# Altium PCB PCB1.PcbDoc
Units mil, origin at the board's own origin, x right, y up, seen from the top; angles counter-clockwise.
Board outline 3700 x 900 mil, 4 copper layers (Top Layer, 3V3, GND, Bottom Layer), stack 23.756 mil thick; 50 components, 28 nets, 185 pads, 72 vias.
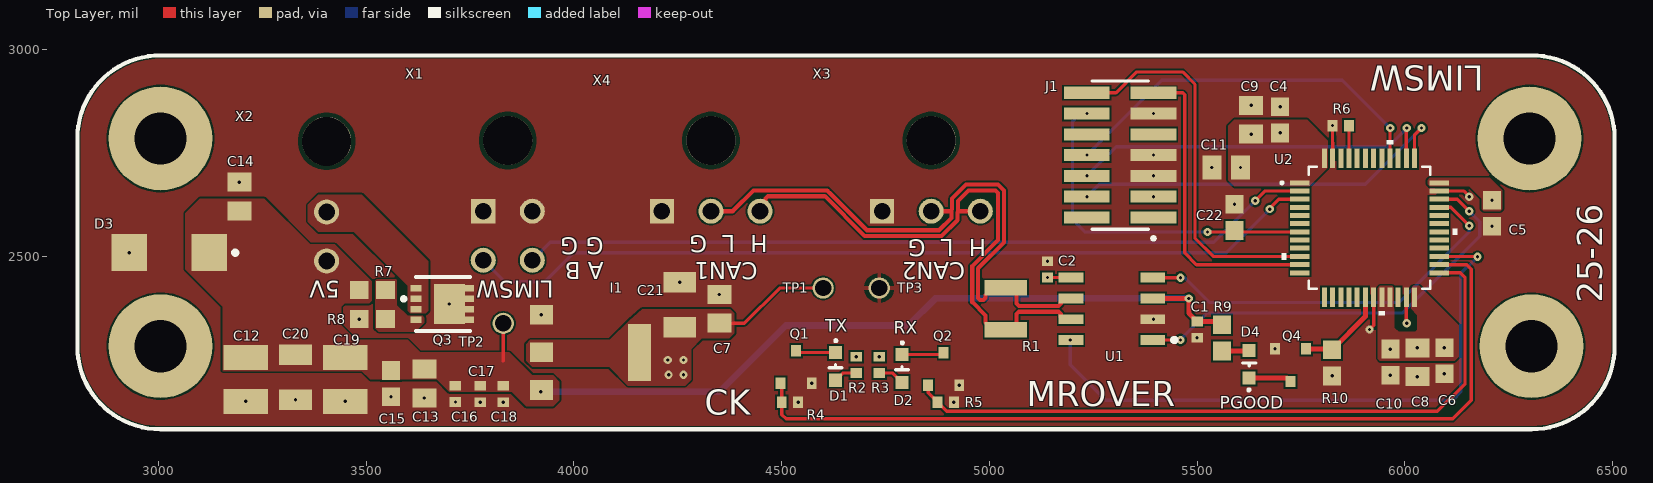
[diagram p0: Top Layer view]
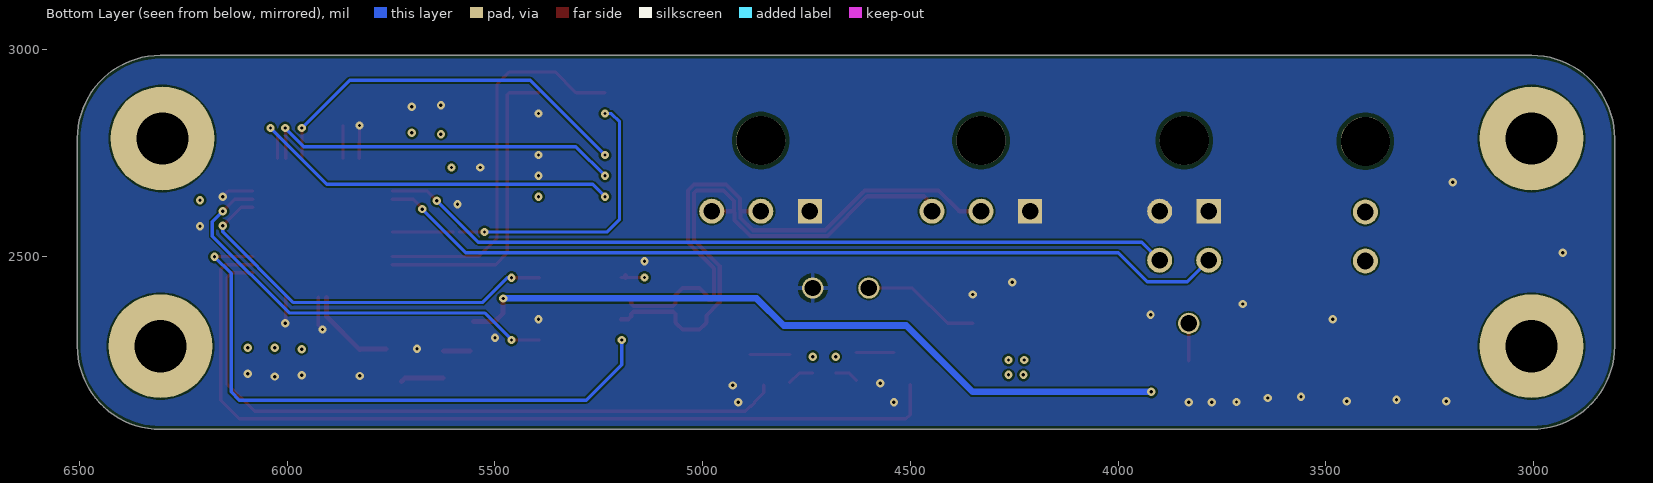
[diagram p1: Bottom Layer view, seen from below]
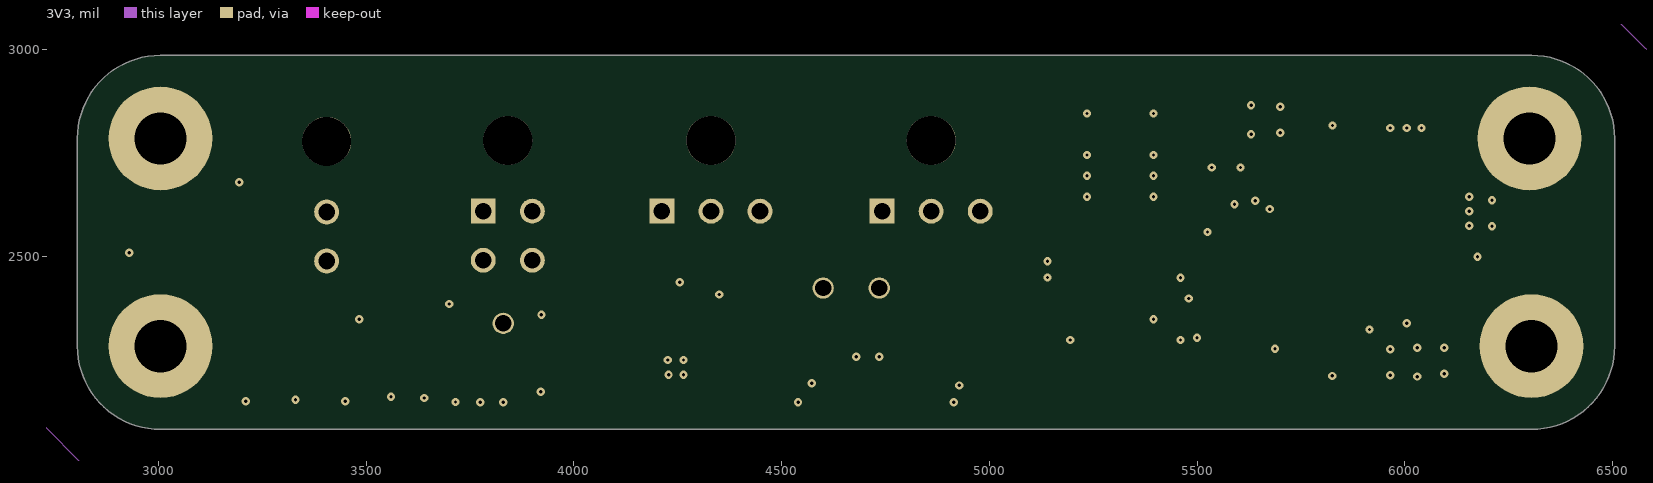
[diagram p2: 3V3]
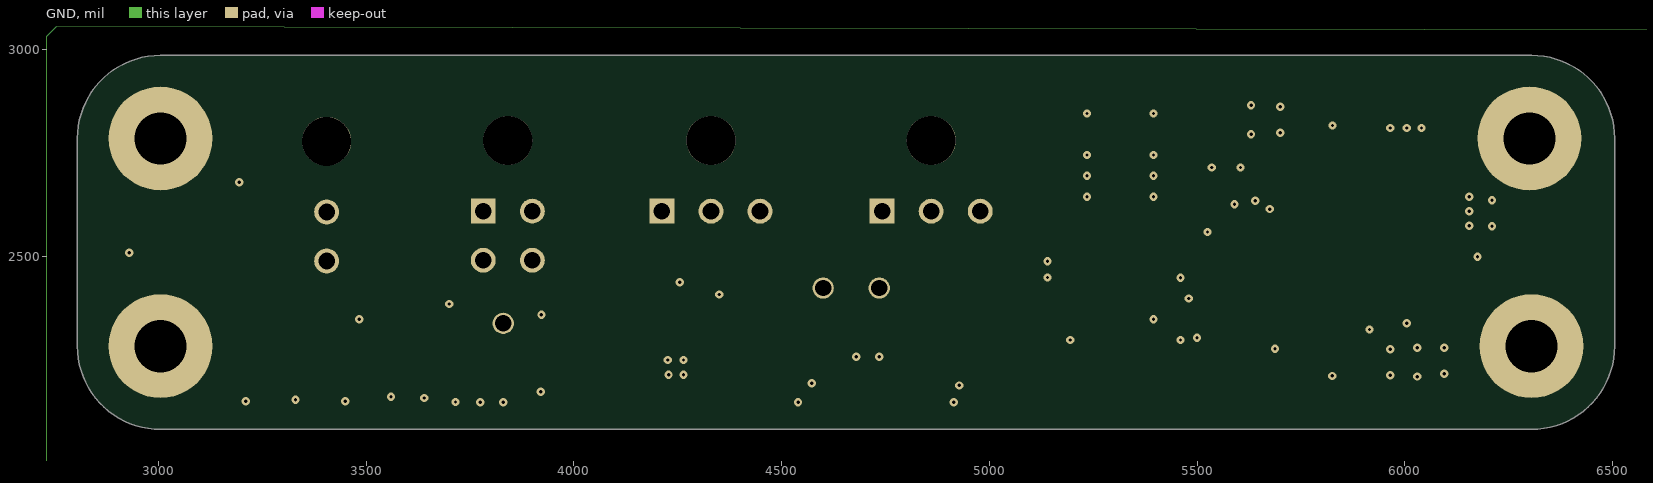
[diagram p3: GND]

## Layer stack, top to bottom
Top Solder: solder mask 0.4, Solder Resist, Dk 3.5
Top Layer: signal copper 1.4
Dielectric 2: prepreg 2.8, PP-006, Dk 4.1
3V3: signal copper 1.378
Dielectric 1: dielectric 12.6, FR-4, Dk 4.8
GND: signal copper 1.378
Dielectric 3: prepreg 2.8, PP-006, Dk 4.1
Bottom Layer: signal copper 1.4
Bottom Solder: solder mask 0.4, Solder Resist, Dk 3.5

## Board outline
2805,2285 2805,2785 cw(c3005,2785) 3005,2985 6305,2985 cw(c6305,2785) 6505,2785 6505,2285 cw(c6305,2285) 6305,2085 3005,2085 cw(c3005,2285)

## Design rules (kind name [scope] priority, off if disabled: settings)
BoardOutlineClearance [All] p1: gap=7.87 ignorepadtopadclearanceinfootprint=FALSE
Clearance "Stitching GND" [IsStitchingVia and InNet('GND') vs (IsVia and (Not IsStitchingVia)) Or IsPad] p1: gap=5 ignorepadtopadclearanceinfootprint=FALSE
Clearance [All] p2: gap=4 ignorepadtopadclearanceinfootprint=FALSE except(5: Arc-Via Track-Via SMDPad-Via THPad-Via Via-Via Via-Fill Via-Poly Via-Region Via-Text; 9.84: Arc-Hole Track-Hole SMDPad-Hole THPad-Hole Via-Hole Fill-Hole Poly-Hole Region-Hole Text-Hole)
ComponentClearance [All] p1: gap=4 collisioncheckmode=3 verticalgap=4 showdistances=TRUE
DiffPairsRouting [All] p1: maxlimit=4 minlimit=4 mostfreqgap=4 toplayer_minwidth=4 toplayer_maxwidth=71497.94 toplayer_prefwidth=4 midlayer1_minwidth=4 midlayer1_maxwidth=71497.94 midlayer1_prefwidth=4 midlayer2_minwidth=4 midlayer2_maxwidth=71497.94 midlayer2_prefwidth=4 bottomlayer_minwidth=4 bottomlayer_maxwidth=71497.94 bottomlayer_prefwidth=4 maxuncoupledlength=500
DiffPairsRouting USB [OnLayer('Top Layer') And InDifferentialPairClass('USB')] p2: maxlimit=5 minlimit=5 mostfreqgap=5 toplayer_maxgap=5 toplayer_prefgap=5 toplayer_minwidth=9.35 toplayer_maxwidth=9.35 toplayer_prefwidth=9.35 midlayer1_mingap=5 midlayer1_minwidth=3.52 midlayer1_maxwidth=3.52 midlayer1_prefwidth=3.52 midlayer2_mingap=5 midlayer2_minwidth=3.52 midlayer2_maxwidth=3.52 midlayer2_prefwidth=3.52 bottomlayer_maxgap=5 bottomlayer_prefgap=5 bottomlayer_minwidth=9.35 bottomlayer_maxwidth=9.35 bottomlayer_prefwidth=9.35 impedanceprofiledriven=TRUE maxuncoupledlength=500
Height [All] p1: minheight=0 maxheight=71497.94 prefheight=500
HoleSize [All] p1: absolutevalues=TRUE maxlimit=248.03 minlimit=7.87 maxpercent=80.000 minpercent=20.000
HoleToHoleClearance [All] p1: gap=9.84 allowstackedmicrovias=FALSE
MinimumAnnularRing [All] p1: minimumring=3
MinimumSolderMaskSliver [All] p1: minsoldermaskwidth=0
PlaneClearance [All] p1: clearance=4
PlaneConnect PlaneConnectPowerPads [InPadClass('PowerPads')] p1: planeconnectstyle=Direct reliefexpansion=20 reliefentries=4 reliefconductorwidth=10 reliefairgap=10
PlaneConnect [All] p2: planeconnectstyle=Direct reliefexpansion=11.81 reliefentries=4 reliefconductorwidth=4 reliefairgap=4
PolygonConnect PolygonConnectPowerPads [All vs (InPadClass('PowerPads'))] p1: connectstyle=Direct reliefconductorwidth=10 reliefentries=4 polygonreliefangle="90 Angle" airgapwidth=10
PolygonConnect [All] p2: connectstyle=Direct reliefconductorwidth=4 reliefentries=4 polygonreliefangle="90 Angle" airgapwidth=4
RoutingVias [All] p1: holewidth=12.01 width=23.82 viastyle="Through Hole" minholewidth=11.81 minwidth=23.62 maxholewidth=15.94 maxwidth=27.76
SilkToSilkClearance [All] p1: silktosilkclearance=0
SilkToSolderMaskClearance [IsPad] p1: minsilkscreentomaskgap=4 clearancetoexposedcopper=TRUE
SolderMaskExpansion [All] p1: expansion=2.95 istentingtop=FALSE
SupplyNets "Schematic Supply Nets_2" [InNet('VBAT')] p1: voltage=0.000
SupplyNets "Schematic Supply Nets_3" [InNet('GND')] p2: voltage=0.000
SupplyNets "Schematic Supply Nets_1" [InNet('5V')] p3: voltage=0.000
Width [All] p1: maxlimit=20 minlimit=4 preferedwidth=10 minimp=50.000000 maximp=50.000000 favimp=50.000000
20 further rules are at their usual default settings.

## Classes and differential pairs
component class MCU: C4 C5 C6 C7 C8 C9 C10 C11 C22 D4 J1 Q4 R6 R9 R10 U2
component class Input_Power: C12 C13 C14 C15 C16 C17 C18 C19 C20 C21 D3 I1 Q3 R7 R8 TP1 TP2 TP3 X2
component class Headers: X1 X3 X4
component class CAN: C1 C2 D1 D2 Q1 Q2 R1 R2 R3 R4 R5 U1
differential pair CAN: +CAN_H -CAN_L

## Components (designator, comment, footprint, x,y, rotation, side; value= is the part's Value field where it differs from the comment)
C1 "CC0402KRX7R7BB104" CAP-0402 5500,2325 r270 top
C2 "CC0402KRX7R7BB104" CAP-0402 5140,2470 r90 top
C4 "CC0603KRX7R0BB104" CAP-0603 5700,2830 r270 top
C5 "CC0603KRX7R0BB104" CAP-0603 6210,2605 r90 top
C6 "CC0603KRX7R0BB104" CAP-0603 6095,2250 r90 top
C7 "CC0805KKX5R9BB475" CAP-0805 4350,2375 r270 top
C8 "GRM2195C1H103JA01D" CAP-0805 6030,2246.5 r90 top
C9 "CC0805KKX7R9BB105" CAP-0805 5630,2830 r270 top
C10 "CC0603KRX7R0BB104" CAP-0603 5965,2246.5 r90 top
C11 "CC0805KKX7R9BB105" CAP-0805 5570,2715 r0 top
C12 "CL32B106KBJNNNE" CAP-1210 3210,2205 r90 top
C13 "CC0805KKX7R9BB105" CAP-0805 3640,2195 r90 top
C14 "CC0805KRX7R9BB104" CAP-0805 3195,2645 r270 top
C15 "CC0603KPX7R9BB103" CAP-0603 3560,2195 r90 top
C16 "CC0402KRX7R9BB102" CAP-0402 3715,2170.32 r90 top
C17 "CC0402JRNPO9BN101" CAP-0402 3775,2170 r90 top
C18 "CC0402JRNPO9BN100" CAP-0402 3830,2170 r90 top
C19 "CL32B106KBJNNNE" CAP-1210 3450,2205 r90 top
C20 "293D106X9016A2TE3" CAP-1206 3330,2210 r90 top
C21 "293D106X9016A2TE3" CAP-1206 4255,2385 r270 top
C22 "CC0603KRX7R0BB104" CAP-0603 5590,2595 r90 top
D1 "BL-HKC36G-AV-TRB" LED-0603 4600.43,2293.2 r270 top
D2 "BL-HKC36G-AV-TRB" LED-0603 4760.43,2288.2 r270 top
D3 "SMBJ6.0" "DO-214AA (SMBJ)" 3025,2510 r0 top
D4 "BL-HKC36G-AV-TRB" LED-0603 5654.57,2184.8 r90 top
I1 "LM1117IMPX-3.3/NOPB" IC-SOT-223-4 4040,2270 r0 top
J1 "FTSH-107-01-L-DV-K" SAMTEC_FTSH-107-01-L-DV-K 5315,2745 r90 top
Q1 "T2N7002AK,LM" IC-SOT23-3 4535,2235 r0 top
Q2 "T2N7002AK,LM" IC-SOT23-3 4890,2230 r0 top
Q3 "CSD18543Q3AT" IC-8VSONCLIP 3585.47,2458.93 r270 top
Q4 "T2N7002AK,LM" IC-SOT23-3 5725,2239.37 r180 top
R1 "RC1210FR-07120RL" RES-1210 5040,2375 r270 top
R2 "RC0402FR-07100RL" RES-0402 4680,2240 r90 top
R3 "RC0402FR-07100RL" RES-0402 4735,2240 r90 top
R4 "RC0402FR-0780K6L" RES-0402 4520,2150 r180 top
R5 "RC0402FR-0780K6L" RES-0402 4895,2150 r180 top
R6 "RC0402FR-070RL" RES-0402 5845.69,2816 r0 top
R7 "RC0603FR-07200KL" RES-0603 3515,2420 r0 top
R8 "RC0603FR-07100KL" RES-0603 3515,2350 r180 top
R9 "RT0603FRE131KL" RES-0603 5560,2305 r270 top
R10 "RT0603FRE131KL" RES-0603 5825,2245 r90 top
TP1 "5003" TEST-POINT-0001 4600,2425 r0 top
TP2 "5003" TEST-POINT-0001 3830,2340 r0 top
TP3 "5003" TEST-POINT-0001 4735,2425 r0 top
U1 "TCAN1044VDRQ1" IC-8SOIC 5295,2375 r90 top
U2 "STM32G431CBT6" IC-LQFP48 5915,2570 r0 top
X1 "Molex - Micro-Fit 3.0 Series connector,  3.00mm (0.118\") pitch header, 4 positions." 43045-0400 3840.94,2780.08 r180 top
X2 "Molex - Micro-Fit 3.0 Series connector,  3.00mm (0.118\") pitch header, 2 positions." 43045-0200 3405,2778.19 r180 top
X3 "Molex 43650-0300" 43650-0300 4860,2780 r180 top
X4 "Molex 43650-0300" 43650-0300 4330,2780 r180 top

## Footprints (in the part's own frame and the unit in brackets; to place one, negate y for a bottom-side part, rotate by r counter-clockwise, add the part's x,y. Pads: shape width x height; smd on the part's side, far side on the other; paste and mask are expansions set on the pad)
43045-0200 [mm]
  round 3 hole 3 unplated: 1(0,0)
  round 1.53 / inner round 1.524 / far side round 1.53 hole 1.02: P$1(0,4.32) P$2(0,7.32)
43045-0400 [mm]
  round 3 hole 3 unplated: 1(0,0)
  rect 1.482x1.482 / inner rect 1.524x1.524 / far side rect 1.482x1.482 hole 1.02: P$1(1.5,4.32)
  round 1.53 / inner round 1.524 / far side round 1.53 hole 1.02: P$2(-1.5,4.32) P$3(1.5,7.32) P$4(-1.5,7.32)
  body extent -5.07,-4.55 5.08,7.69, height 8.83
43650-0300 [mm]
  round 3 hole 3 unplated: 1(0,0)
  rect 1.482x1.482 / inner rect 1.524x1.524 / far side rect 1.482x1.482 hole 1.02: P$1(3,4.32)
  round 1.53 / inner round 1.524 / far side round 1.53 hole 1.02: P$2(0,4.32) P$3(-3,4.32)
  body extent -6.32,-4.57 6.33,5.33, height 5.68
CAP-0402 [mm]
  rect 0.6x0.7 smd: 1(-0.5,0) 2(0.5,0)
  body extent -0.5,-0.22 0.5,0.23, height 0.5
CAP-0603 [mm]
  rect 1.15x1.1 smd: 1(-0.8,0) 2(0.8,0)
  body extent -0.8,-0.45 0.8,0.45, height 0.8
CAP-0805 [mm]
  rect 1.16x1.47 smd: 1(-0.88,0) 2(0.88,0)
  body extent -1,-0.63 1,0.63, height 0.94
CAP-1206 [mm]
  rect 1.25x2 smd: 1(-1.375,0) 2(1.375,0)
  body extent -1.6,-0.8 1.6,0.8, height 1.5
CAP-1210 [mm]
  rect 1.53x2.72 smd: 1(-1.341,0) 2(1.341,0)
  body extent -1.6,-1.25 1.6,1.25, height 2.7
"DO-214AA (SMBJ)" [mm]
  rect 2.16x2.26 smd: 1(-2.416,0) 2(2.484,0)
  silkscreen extent 3.94,-0.12 4.19,0.12, body extent -2.72,-1.95 2.78,1.95, height 2.45
IC-8SOIC [mm]
  rect 0.6x1.5 smd: 1(-1.905,-2.5) 2(-0.635,-2.5) 3(0.635,-2.5) 4(1.905,-2.5) 5(1.905,2.5) 6(0.635,2.5) 7(-0.635,2.5) 8(-1.905,2.5)
  silkscreen extent -2.03,-3.94 -1.78,-3.69, body extent -2.45,-3 2.45,3, height 1.75
IC-8VSONCLIP [mm]
  rect 0.4x0.7 smd paste-100 mask+0.05: 1(2.812,0.877) 2(0.862,0.877) 2(1.512,0.877) 2(2.162,0.877) 3(0.862,4.077) 3(1.512,4.077) 3(2.162,4.077) 3(2.812,4.077)
  rect 2.45x1.9 smd paste-100 mask+0.05: 3(1.837,2.917)
  silkscreen extent 0.19,0.03 3.49,4.18, body extent 0.18,0.89 3.48,4.19, height 1.1
IC-LQFP48 [mil]
  rect 47x12 smd paste+0 mask+0: 1(-167.32,108.27) 2(-167.32,88.58) 3(-167.32,68.9) 4(-167.32,49.21) 5(-167.32,29.53) 6(-167.32,9.84) 7(-167.32,-9.84) 8(-167.32,-29.53) 9(-167.32,-49.21) 10(-167.32,-68.9) 11(-167.32,-88.58) 12(-167.32,-108.27) 25(167.32,-108.27) 26(167.32,-88.58) 27(167.32,-68.9) 28(167.32,-49.21) 29(167.32,-29.53) 30(167.32,-9.84) 31(167.32,9.84) 32(167.32,29.53) 33(167.32,49.21) 34(167.32,68.9) 35(167.32,88.58) 36(167.32,108.27)
  rect 12x47 smd paste+0 mask+0: 13(-108.27,-167.32) 14(-88.58,-167.32) 15(-68.9,-167.32) 16(-49.21,-167.32) 17(-29.53,-167.32) 18(-9.84,-167.32) 19(9.84,-167.32) 20(29.53,-167.32) 21(49.21,-167.32) 22(68.9,-167.32) 23(88.58,-167.32) 24(108.27,-167.32) 37(108.27,167.32) 38(88.58,167.32) 39(68.9,167.32) 40(49.21,167.32) 41(29.53,167.32) 42(9.84,167.32) 43(-9.84,167.32) 44(-29.53,167.32) 45(-49.21,167.32) 46(-68.9,167.32) 47(-88.58,167.32) 48(-108.27,167.32)
  silkscreen extent -214,-211 211,211, body extent -177,-177 177,177, height 63
IC-SOT23-3 [mm]
  rect 0.6x0.7 smd: 1(-0.95,-1) 2(0.95,-1) 3(0,1)
  body extent -1.46,-1.18 1.46,1.19, height 1.12
IC-SOT-223-4 [mm]
  rect 1.4x1.2 smd mask+0.07: 1(-3,2.3) 3(-3,-2.3) 4(-3,0)
  rect 1.4x3.5 smd: 2(3,0)
  body extent -3.5,-3.25 3.5,3.25, height 1.68
LED-0603 [mm]
  rect 0.8x0.8 smd: 1(2.291,0.751) 2(0.589,0.751)
  silkscreen extent -0.2,0.34 1.52,1.13, body extent 0.65,0.36 2.25,1.16, height 0.39
RES-0402 [mm]
  rect 0.6x0.7 smd: 1(-0.5,0) 2(0.5,0)
  body extent -0.5,-0.25 0.5,0.25, height 0.3
RES-0603 [mm]
  rect 1.15x1.1 smd: 1(-0.8,0) 2(0.8,0)
  body extent -0.8,-0.4 0.8,0.4, height 0.43
RES-1210 [mm] "Chip Resistor, 2-Leads, Body 3.10x2.60mm, IPC High Density"
  rect 0.95x2.6 smd: 1(-1.275,0) 2(1.275,0)
  body extent -1.6,-1.35 1.6,1.35, height 0.6
SAMTEC_FTSH-107-01-L-DV-K [mm]
  rect 0.74x2.79 smd: 01(-3.81,-2.035) 02(-3.81,2.035) 03(-2.54,-2.035) 04(-2.54,2.035) 05(-1.27,-2.035) 06(-1.27,2.035) 07(0,-2.035) 08(0,2.035) 09(1.27,-2.035) 10(1.27,2.035) 11(2.54,-2.035) 12(2.54,2.035) 13(3.81,-2.035) 14(3.81,2.035)
  silkscreen extent -5.19,-2.13 4.53,1.72, body extent -4.44,-2.82 4.44,3.02, height 5.96
TEST-POINT-0001 [mm] "2024 miniature test point"
  round 1.3 hole 1: 1(0,0)
  body extent -1.27,-1.27 1.27,1.27, height 4.57

## Part data
C1 C2: library part CAP-0.1U-0001, "CAP CER 0.1UF 16V X7R 0402", Capacitance="100 nF", Voltage Rating="16 V", ComponentLink2Description=Datasheet, ComponentLink2URL=https://www.yageo.com/upload/media/product/productsearch/datasheet/mlcc/UPY-GPHC_X7R_6.3V-to-250V_24.pdf, Device Class=Ceramic, Size=0402
C4 C5 C6 C10 C22: library part CAP-100N-0001, "CAP CER 0.1UF 100V X7R 0603", Capacitance="100 nF", Voltage="100 V", ComponentLink1Description=Datasheet, ComponentLink1URL=https://www.yageo.com/upload/media/product/app/datasheet/mlcc/upy-np0x7r_mv_100-to-630v.pdf, Device Class=Ceramic, Size=0603
C7: library part CAP-4.7U-0002, "CAP CER 4.7UF 50V X5R 0805", Capacitance="4.7 uF", Voltage="50 V", ComponentLink2Description=Datasheet, ComponentLink2URL=http://www.yageo.com/documents/recent/UPY-GPHC_Y5V_6.3V-to-50V_8.pdf, Device Class=Ceramic, Size=0805
C8: library part CAP-10N-0001, "CAP CER 10000PF 50V C0G/NP0 0805", Capacitance=10nF, Voltage=50V, ComponentLink1Description=Datasheet, ComponentLink1URL=https://search.murata.co.jp/Ceramy/image/img/A01X/G101/ENG/GRM2195C1H103JA01-01.pdf, Device Class=Ceramic, Size=0805
C9 C11 C13: library part CAP-1U-0001, "CAP CER 1UF 50V X7R 0805", Capacitance="1.0 uF", Voltage="50 V", ComponentLink2Description=Datasheet, ComponentLink2URL=https://www.yageo.com/upload/media/product/productsearch/datasheet/mlcc/UPY-GPHC_X7R_6.3V-to-250V_24.pdf, Device Class=Ceramic, Size=0805
C12 C19: library part CAP-10U-0002, "CAP CER 10UF 50V X7R 1210", Capacitance="10 uF", Voltage=50V, ComponentLink1Description=Datasheet, ComponentLink1URL=https://mm.digikey.com/Volume0/opasdata/d220001/medias/docus/41/CL32B106KBJNNNE_Spec.pdf, Device Class=Ceramic, Size=1210
C14: library part CAP-0.1U-0002, "CAP CER 0.1UF 50V X7R 0805", Capacitance="100 nF", Voltage Rating="50 V", ComponentLink2Description=Datasheet, ComponentLink2URL=https://www.yageo.com/upload/media/product/productsearch/datasheet/mlcc/UPY-GPHC_X7R_6.3V-to-250V_24.pdf, Device Class=Ceramic, Size=0805
C15: library part CAP-10N-0002, "CAP CER 10000PF 50V X7R 0603", Capacitance="10 nF", Voltage="50 V", ComponentLink2Description=Datasheet, ComponentLink2URL=http://www.yageo.com/documents/recent/UPY-GPHC_X7R_6.3V-to-50V_18.pdf, Device Class=Ceramic, Size=0603
C16: library part CAP-1N-0001, "CAP CER 1000PF 50V X7R 0402", Capacitance="1.0 nF", Voltage="50 V", ComponentLink2Description=Datasheet, ComponentLink2URL=http://www.yageo.com/documents/recent/UPY-GP_NP0_16V-to-50V_16.pdf, Device Class=Ceramic, Size=0402
C17: library part CAP-100P-0001, "CAP CER 100PF 50V C0G/NPO 0402", Capacitance="100 pF", Voltage=50V, ComponentLink1Description=Datasheet, ComponentLink1URL=https://www.yageo.com/upload/media/product/productsearch/datasheet/mlcc/UPY-GP_NP0_16V-to-50V_18.pdf, Device Class=Ceramic, Size=0402
C18: library part CAP-10P-0001, "CAP CER 10PF 50V C0G/NPO 0402", Capacitance="10 pF", Voltage=50V, ComponentLink1Description=Datasheet, ComponentLink1URL=https://www.yageo.com/upload/media/product/productsearch/datasheet/mlcc/UPY-GP_NP0_16V-to-50V_18.pdf, Device Class=Ceramic, Size=0402
C20 C21: library part CAP-10U-0004, "CAP TANT 10UF 10% 16V 1206", Capacitance="10 uF", Voltage=16V, ComponentLink1Description=Datasheet, ComponentLink1URL=https://www.lcsc.com/datasheet/lcsc_datasheet_2304140030_Vishay-Intertech-293D106X9016A2TE3_C110038.pdf, Device Class=Tantalum, Size=1206
D1 D2 D4: library part LED-0001, "LED YELLOW CLEAR 0603 SMD", Forward Current=30mA, Forward Voltage=2V, ComponentLink1Description=Datasheet, ComponentLink1URL=https://www.americanbrightled.com/pdffiles/led-components/smt/BL-HKC36G-AV-TRB.pdf
D3: library part DIO-TVS-0001, "TVS DIODE 40VWM 64.5VC DO214AA", Current Rating=9.3A, Voltage Rating=64.5V, ComponentLink1Description=Datasheet, ComponentLink1URL=https://www.littelfuse.com/media?resourcetype=datasheets&itemid=09a6ae9a-73cb-4ac4-acac-e6dab92ab953&filename=littelfuse_tvs_diode_smbj_datasheet.pdf
I1: library part IC_LDO_3V3_0001, "IC REG LIN 3.3V 800MA SOT223-4", ComponentLink1Description="New link", ComponentLink1URL=https://www.ti.com/lit/ds/symlink/lm1117.pdf?HQS=dis-dk-null-digikeymode-dsf-pf-null-wwe&ts=1721700739746
J1: library part CONN_Flashing-0001, "Connector Header Surface Mount 14 position 0.050\" (1.27mm)", Package=None, Availability=Unavailable, ComponentLink1Description=Datasheet, ComponentLink1URL=https://mm.digikey.com/Volume0/opasdata/d220001/medias/docus/6209/ftsh-1xx-xx-xxx-dv-xxx-xxx-x-xx-mkt.pdf, MF=Samtec, MP=FTSH-107-01-L-DV-K, Price=None
Q1 Q2 Q4: library part NMOS-200MA-0001, "MOSFET N-CH 60V 200MA SOT23", Continuous Current=200mA, Voltage=60V, ComponentLink1Description=Datasheet, ComponentLink1URL=https://toshiba.semicon-storage.com/info/T2N7002AK_datasheet_en_20150401.pdf?did=29712&prodName=T2N7002AK
Q3: library part NMOS-60A-0001, "MOSFET N-CH 60V 12A/60A 8VSON", Continuous Current=60A, Voltage=60V, ComponentLink2Description=Datasheet, ComponentLink2URL=http://www.ti.com/lit/ds/symlink/csd18543q3a.pdf
R1: library part RES-120-0001, "RES 120 OHM 1% 1/2W 1210", Power=1/2W, Resistance=120R, Tolerance=1%, ComponentLink1Description=Datasheet, ComponentLink1URL=https://www.yageo.com/upload/media/product/products/datasheet/rchip/PYu-RC_Group_51_RoHS_L_12.pdf, Size=1210
R2 R3: library part RES-100-0001, "RES 100 OHM 1% 1/16W 0402", Power=1/16W, Resistance=100R, Tolerance=1%, ComponentLink1Description=Datasheet, ComponentLink1URL=https://www.yageo.com/upload/media/product/products/datasheet/rchip/PYu-RC_Group_51_RoHS_L_12.pdf, Size=0402
R4 R5: library part RES-80.6k-0001, "80.6 kOhms ±1% 0.063W, 1/16W Chip Resistor 0402 (1005 Metric) Moisture Resistant Thick Film", Power=1/16W, Resistance=80.6k, Tolerance=1%, ComponentLink1Description=Datasheet, ComponentLink1URL=https://www.yageo.com/upload/media/product/products/datasheet/rchip/PYu-RC_Group_51_RoHS_L_12.pdf, Size=0402
R6: library part RES-0-0002-JLC, "62.5mW Thick Film Resistors 50V -55℃~+155℃ 0Ω 0402 Chip Resistor - Surface Mount ROHS", JLC part number=C106231, Power="62.5 mW", Resistance="0 Ohm", Assembled?=yes
R7: library part RES-200k-0001, "RES SMD 200K OHM 1% 1/10W 0603", Power=100mW, Resistance=200k, Tolerance=1%, ComponentLink1Description=Datasheet, ComponentLink1URL=https://www.yageo.com/upload/media/product/products/datasheet/rchip/PYu-RC_Group_51_RoHS_L_12.pdf, Size=0603
R8: library part RES-100k-0001, "RES SMD 100K OHM 1% 1/10W 0603", Power=100mW, Resistance=100k, Tolerance=1%, ComponentLink1Description=Datasheet, ComponentLink1URL=https://www.yageo.com/upload/media/product/products/datasheet/rchip/PYu-RC_Group_51_RoHS_L_12.pdf, Size=0603
R9 R10: library part RES-1K-0002, "1 kOhms ±1% 0.1W, 1/10W Chip Resistor 0603 (1608 Metric) Thin Film", Manufacturer=YAGEO, Package Size=0603, Power Rating=1/10W, Resistance="1kOhm +/-1%", Assembled?=no, Manufacturer Part Number=RT0603FRE131KL
TP1 TP2 TP3: library part TEST-POINT-0001, "Oranange PC Test Point, Miniature Phoisphor Bronze Silver Plating Through Hole Mounting Type"
U1: library part IC-CAN-0001, "IC TRANSCEIVER 1/1 8SOIC", ComponentLink1Description=Datasheet, ComponentLink1URL=https://www.ti.com/lit/ds/symlink/tcan1044-q1.pdf?HQS=dis-dk-null-digikeymode-dsf-pf-null-wwe&ts=1728758303289&ref_url=https%253A%252F%252Fwww.ti.com%252Fgeneral%252Fdocs%252Fsuppproductinfo.tsp%253FdistId%253D10%2526gotoUrl%253Dhttps%253A%252F%252Fwww.ti.com%252Flit%252Fgpn%252Ftcan1044-q1
U2: library part IC-STM32G431CBT6, "IC MCU 32BIT 128KB FLASH 48LQFP", Package=48LQFP, ComponentLink1Description=Datasheet, ComponentLink1URL=https://www.st.com/resource/en/datasheet/stm32g431cb.pdf
X1: library part HEADER_POS4_?43045-0401, Package=43045-0400, DeviceName=43045-0401, DeviceSetName=HEADER_POS4_?, GateName_1=G$1, LibraryName=con-molex-micro-fit-3_0_2, SymbolName_1=HEADER_POS4
X2: library part HEADER_POS2_?43045-0200, Package=43045-0200, DeviceName=43045-0200, DeviceSetName=HEADER_POS2_?, GateName_1=G$1, LibraryName=con-molex-micro-fit-3_0_2, SymbolName_1=HEADER_POS2
X3 X4: library part "Micro-Fit Molex 3 Pin Right Angle", Package=43650-0300, DeviceName=43650-0300, DeviceSetName=HEADER_POS3_?, GateName_1=G$1, LibraryName=con-molex-micro-fit-3_0_2, SymbolName_1=HEADER_POS3

## Free pads (board coordinates)
  round 250 hole 126: ""(3005,2285) ""(3005,2785) ""(6300,2785) ""(6305,2285)

## Via types
v1: diameter 20, hole 8, Top Layer to Bottom Layer, 72 vias

## Nets (pads, with @x,y where several pads share a name; then routed paths per layer and width w, separated by ;. In a path a pad name is that pad's centre, name@x,y a point inside that pad or via, vN(x,y) a via of type N, cw(c..) or ccw(c..) an arc to the next point about the centre after c; other vN are vias at no path point)
5V: C1.1 C12.2 C13.2 C14.2 C15.2 C16.2 C17.2 C18.2 C19.2 C20.2 D3.2 I1.3 R7.1 TP2.1 U1.3 X2.P$2 | length 1945.2
  Top Layer w8: 3830,2250 TP2.1
  Top Layer w12: U1.3 v1(5480,2400) 5480,2364.68 C1.1 5551.81,2344.68
  Bottom Layer w16: v1(3920,2175) 4350,2175 4510,2335 4805,2335 4870,2400 5345,2400 v1(5480,2400)
CAN_H: R1.2 U1.7 X3.P$3 X4.P$3 | length 1370.3
  Top Layer w10: X4.P$3 4448.11,2623.51 4461.66,2637.06 4461.66,2640.18 4467.52,2646.04 4603.96,2646.04 4700,2550 4885,2550 4923.06,2588.05 4923.06,2607.58 4925.4,2609.92 ; X3.P$3 4925.4,2609.92 ; U1.7 5178.86,2350 5172.05,2356.81 5172.05,2362.14 5166.19,2368 5071.05,2368 5065.2,2362.14 5065.2,2341.5 5048.5,2324.8 R1.2 5007.52,2324.8 4990.82,2341.5 4990.82,2359.14 4959,2390.96 4959,2478.42 5021,2540.42 5021,2654.14 5015.14,2660 4949.8,2660 4924.23,2634.43 4924.23,2611.09 4925.4,2609.92
CAN_L: R1.1 U1.6 X3.P$2 X4.P$2 | length 1458.8
  Top Layer w10: X4.P$2 4382.4,2609.92 4432.52,2660.04 4609.76,2660.04 4617.96,2651.84 4705.8,2564 4879.2,2564 4909.06,2593.85 4909.06,2609.92 ; X3.P$2 4909.06,2609.92 ; U1.6 5178.86,2400 5172.05,2393.19 5172.05,2387.86 5166.19,2382 5071.05,2382 5065.2,2387.86 5065.2,2408.5 5048.5,2425.2 R1.1 5007.52,2425.2 4990.82,2408.5 4990.82,2401.53 4985.89,2396.6 4977.73,2396.6 4973,2401.32 4973,2472.62 5035,2534.62 5035,2659.94 5020.94,2674 4944,2674 4910.23,2640.23 4910.23,2614.55 4909.06,2613.38 4909.06,2609.92
CAN_RX: U1.4 U2.33 | length 962.8
  Top Layer w8: U1.4 v1(5460,2450) ; U2.33 6110.79,2619.21 v1(6155,2575)
  Bottom Layer w8: v1(5460,2450) 5470,2450 5530,2390 5985,2390 6155,2560 v1(6155,2575)
CAN_RX_LED: Q2.1 R5.2 U2.25 | length 1680.1
  Top Layer w8: Q2.1 4852.6,2172.72 R5.2 4875.31,2148.03 4883.13,2140.22 4885.09,2140.22 4897.09,2128.22 6078.22,2128.22 6145,2195 6145,2450 6133.27,2461.73 U2.25
CAN_STB: U1.8 U2.27 | length 1478.2
  Top Layer w8: v1(5195,2300) U1.8 ; U2.27 v1@6173.9,2501.1
  Bottom Layer w8: v1(5195,2300) 5195,2240 5280,2155 5675,2155 6115,2155 6135,2175 6135,2460 v1(6175,2500)
CAN_TX: U1.1 U2.34 | length 1045.1
  Top Layer w8: U1.1 v1(5460,2300) ; U2.34 6126.1,2638.9 v1(6155,2610)
  Bottom Layer w8: v1(5460,2300) 5525,2365 5995,2365 6180,2550 6180,2585 v1(6155,2610)
CAN_TX_LED: Q1.1 R4.2 U2.26 | length 2152.6
  Top Layer w8: Q1.1@4500.31,2192.91 R4.2 4500.31,2120.32 4510.63,2110 6115,2110 6160,2155 6160,2470 6149.29,2480.71 6083.03,2480.71 U2.26
GND: C1.2 C2.2 C4.1 C5.1 C6.1 C7.1 C8.1 C9.1 C10.1 C11.1 C12.1 C13.1 C14.1 C15.1 C16.1 C17.1 C18.1 C19.1 C20.1 C21.1 C22.2 D3.1 I1.1 J1.05 J1.07 J1.11 Q1.2 Q2.2 Q3.3 Q4.2 R4.1 R5.1 R6.1 R8.2 R10.1 TP3.1 U1.2 U2.19 U2.23 U2.35 U2.47 X1.P$1 X1.P$2 X3.P$1 X4.P$1 | length 302.1
  Top Layer w8: v1(5590,2626.5) C22.2@5591.5,2625 ; v1(5826,2816) U2.47 ; v1(5915,2325) 5924.84,2334.84 U2.19 ; v1@6003.58,2341.42 U2.23 ; U2.35 6141.42,2658.58 v1(6155,2645)
  other v1: 3775,2150.32 3830,2150.32 4539.69,2150 4914.69,2150 3715,2150.63 3210,2152.2 3450,2152.2 3330,2155.87 3640,2160.35 3560,2163.5 4927.4,2190.63 4572.4,2195.63 6030,2211.85 5825,2213.5 5965,2215 6095,2218.5 5687.6,2278.74 5500,2305.32 6005,2340 3483.5,2350 5395,2350 3921.89,2360.55 3700.31,2386.61 4350,2409.65 4255,2439.13 5140,2489.68 2929.88,2510 6210,2573.5 3195,2679.65 5395.12,2695 5535.35,2715 5395.12,2745 5395.12,2845 5700,2861.5 5630,2864.65
LIMIT_A: U2.2 X1.P$4 | length 1916.7
  Top Layer w8: v1(5640,2635) 5663.58,2658.58 U2.2
  Bottom Layer w8: X1.P$4 3943.11,2535 5540,2535 v1(5640,2635)
LIMIT_B: U2.3 X1.P$3 | length 2070.8
  Top Layer w8: v1(5675,2615) 5675,2617 5696.9,2638.9 U2.3
  Bottom Layer w8: X1.P$3 3833.77,2440 3930,2440 4000,2510 5340,2510 5570,2510 v1(5675,2615)
NetD1_1: D1.1 R2.1 | length 57.2
  Top Layer w8: D1.1 4647.31,2220.32 R2.1
NetD1_2: D1.2 Q1.3 | length 90.6
  Top Layer w8: Q1.3@4539.37,2270 D1.2
NetD2_1: D2.1 R3.1 | length 64.2
  Top Layer w8: R3.1 4767.69,2220.32 D2.1
NetD2_2: D2.2 Q2.3 | length 95.6
  Top Layer w8: D2.2 Q2.3@4885.63,2265
NetD4_1: D4.1 R9.2 | length 63.5
  Top Layer w12: R9.2 D4.1@5623.5,2273.5
NetD4_2: D4.2 Q4.3 | length 103.3
  Top Layer w12: D4.2 5717,2208 Q4.3
NetQ3_1: Q3.1 R7.2 R8.1
NetR6_2: R6.2 U2.45 | length 78.3
  Top Layer w8: U2.45 R6.2@5865.79,2815.58
NRST: C22.1 J1.12 U2.7 | length 824.6
  Top Layer w8: v1(5525,2560) C22.1@5586.5,2560 ; C22.1@5600,2560 U2.7@5747.52,2560
  Bottom Layer w8: v1(5234.88,2845) 5234.77,2844.88 5219.88,2844.88 5200,2825 5200,2590 5230,2560 v1(5525,2560)
PGOOD: Q4.1 R10.2 U2.18 | length 219.7
  Top Layer w12: Q4.1 R10.2@5822.76,2278.74 ; R10.2 5905.16,2356.65 U2.18
RevPolDrain: Q3.2 X2.P$1
SWCLK: J1.06 U2.38 | length 891
  Top Layer w8: U2.38 6003.58,2808.58 v1(6005,2810)
  Bottom Layer w8: v1(5234.88,2695) 5304.88,2765 5960,2765 v1(6005,2810)
SWDIO: J1.04 U2.37 | length 953.1
  Top Layer w8: U2.37 6023.27,2793.27 v1(6040,2810)
  Bottom Layer w8: v1(5234.88,2645) 5264.88,2675 5905,2675 v1(6040,2810)
SWO: J1.08 U2.40 | length 924.2
  Top Layer w8: U2.40 v1@5964.21,2809.21
  Bottom Layer w8: v1(5234.88,2745) 5414.88,2925 5850,2925 v1(5965,2810)
UART_RX: J1.13 U2.11 | length 746.7
  Top Layer w8: J1.13 5465.31,2895 5470,2890.31 5470,2510 5498.58,2481.42 U2.11
UART_TX: J1.14 U2.10 | length 934.1
  Top Layer w8: J1.14 5305,2895 5355,2945 5465,2945 5495,2915 5495,2545 5538.9,2501.1 U2.10
VBAT: C2.1 C4.2 C5.2 C6.2 C7.2 C8.2 C9.2 C10.2 C11.2 C21.2 I1.2 I1.4 J1.03 R2.2 R3.2 TP1.1 U1.5 U2.1 U2.20 U2.21 U2.24 U2.36 U2.48 | length 345.7
  Top Layer w8: C7.2 4410.35,2340.35 4495,2425 TP1.1 ; v1(5140,2450.32) U1.5@5196.26,2450.32
  Top Layer w12: U1.5@5185.31,2450.32 U1.5@5185.31,2454.68
  other v1: 4228,2216 4264,2216 4226,2252 4264,2252 4680,2259.68 4735,2259.68 5965,2277.99 6030,2281.14 6095,2281.5 6210,2636.5 5395.12,2645 5604.65,2715 5630,2795.35 5700,2798.5
pads on no net: J1.01 J1.02 J1.09 J1.10 R9.1 U2.4 U2.5 U2.6 U2.8 U2.9 U2.12 U2.13 U2.14 U2.15 U2.16 U2.17 U2.22 U2.28 U2.29 U2.30 U2.31 U2.32 U2.39 U2.41 U2.42 U2.43 U2.44 U2.46 X1.1 X2.1 X3.1 X4.1

## Polygon pours and split planes (outlines as drawn)
GND on Top Layer "GND_L01_P009" (solid, pour order 9): 2740,3060 2750,3050 2750,2015 6580,2015 6635,2070 6635,3085
VBAT on Top Layer "VBAT_L01_P004" (solid, pour order 4): 4086,2300 3895,2300 3885,2290 3885,2250 3900,2235 4085,2235 4130,2190 4268,2190 4282,2204 4282,2278 4308,2304 4374,2304 4386,2316 4386,2364 4376,2374 4164,2374 4134,2348
VBAT on Top Layer "VBAT_L01_P008" (solid, pour order 8): 5575,2685 5590,2670 5770,2670 5815,2715 5815,2780 5765,2830 5590,2830 5575,2815
VBAT on Top Layer "VBAT_L01_P007" (solid, pour order 7): 6020,2430 6015,2425 6015,2375 6030,2360 6030,2325 6025,2320 5985,2320 5975,2330 5975,2425 5970,2430 5940,2430 5935,2425 5935,2255 5940,2250 6120,2250 6130,2260 6130,2335 6035,2430
VBAT on Top Layer "VBAT_L01_P006" (solid, pour order 6): 6060,2690 6055,2685 6055,2675 6060,2670 6155,2670 6185,2640 6185,2615 6190,2610 6230,2610 6235,2615 6235,2660 6205,2690
NetQ3_1 on Top Layer "NETQ3_1_L01_P002" (solid, pour order 2): 3526,2446 3522,2442 3522,2328 3530,2320 3618,2320 3640,2342 3640,2354 3636,2358 3600,2358 3574,2384 3574,2444 3572,2446
RevPolDrain on Top Layer "REVPOLDRAIN_L01_P001" (solid, pour order 1): 3644,2364 3650,2370 3650,2490 3490,2650 3385,2650 3360,2625 3360,2585 3385,2560 3470,2560 3600,2430 3600,2370 3606,2364
5V on Top Layer "5V_L01_P000" (solid, pour order 0): 3425,2530 3365,2530 3255,2640 3100,2640 3065,2605 3065,2470 3155,2380 3155,2225 3490,2225 3510,2205 3670,2205 3700,2175 3850,2175 3885,2140 3950,2140 3965,2155 3965,2200 3950,2215 3900,2215 3845,2270 3630,2270 3600,2300 3475,2300 3440,2335 3440,2380 3448,2388 3508,2388 3514,2394 3514,2441
GND on GND "NONET_L03_P003" (solid, shelved, pour order 3): 2754,3054 2730,3030 2730,2008 6584,2008 6650,2074 6596,2128 6596,3046
VBAT on 3V3 "NONET_L02_P005" (solid, shelved, pour order 5): 2704,3092 2704,2114 2834,1984 2852,2002 6648,2002 6648,2934 6514,3068
GND on Bottom Layer "GND_L04_P010" (solid, pour order 10): 2740,3175 2740,1845 2680,1785 2735,1730 6820,1730 6820,2980 6675,3125

## Silkscreen, mask and mechanical layers (free items; w line width, h text height)
Top Overlay:
  the board outline again, w10
  text "LIMSW" at 6190,2960 h60 r180
  text "H  L  G" at 4467,2552 h40 r180
  text "G G" at 4072,2547 h40 r180
  text "H  L  G" at 4992,2542 h40 r180
  text "A B" at 4072,2487 h40 r180
  text "CAN1" at 4442,2487 h40 r180
  text "CAN2" at 4942,2487 h40 r180
  text "5V" at 3437,2442 h40 r180
  text "LIMSW" at 3952,2442 h40 r180
  text "25-26" at 6475,2390 h60 r90
  text "TX" at 4605,2320 h30
  text "RX" at 4770,2315 h30
  text "MROVER" at 5090,2140 h60
  text "PGOOD" at 5555,2135 h30
  text "CK" at 4315,2120 h60